# Altium PCB LCD20x4_I2C.PcbDoc
Units mm, origin at the board's own origin, x right, y up, seen from the top; angles counter-clockwise.
Board outline 54 x 18 mm, 2 copper layers (Top Layer, Bottom Layer); 21 components, 23 nets, 73 pads, 28 vias.
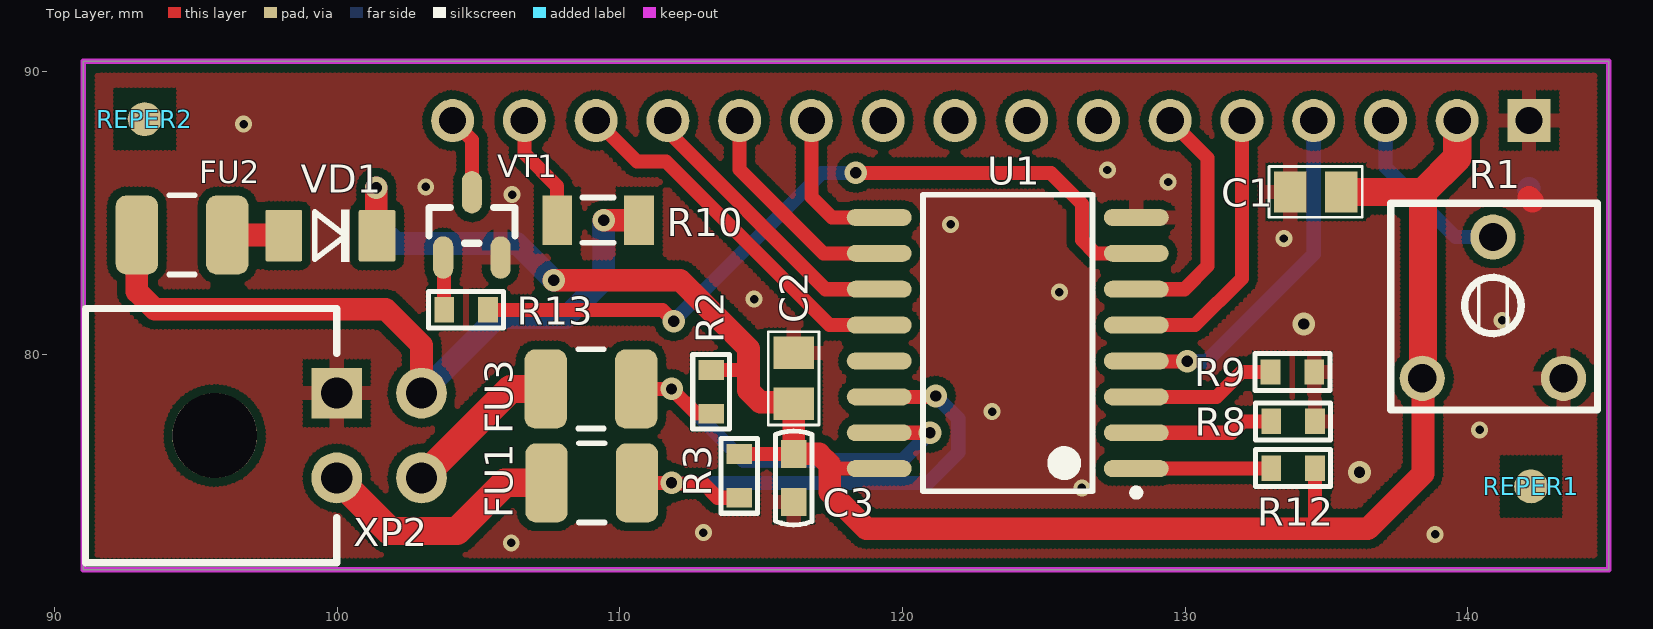
[diagram p0: Top Layer view]
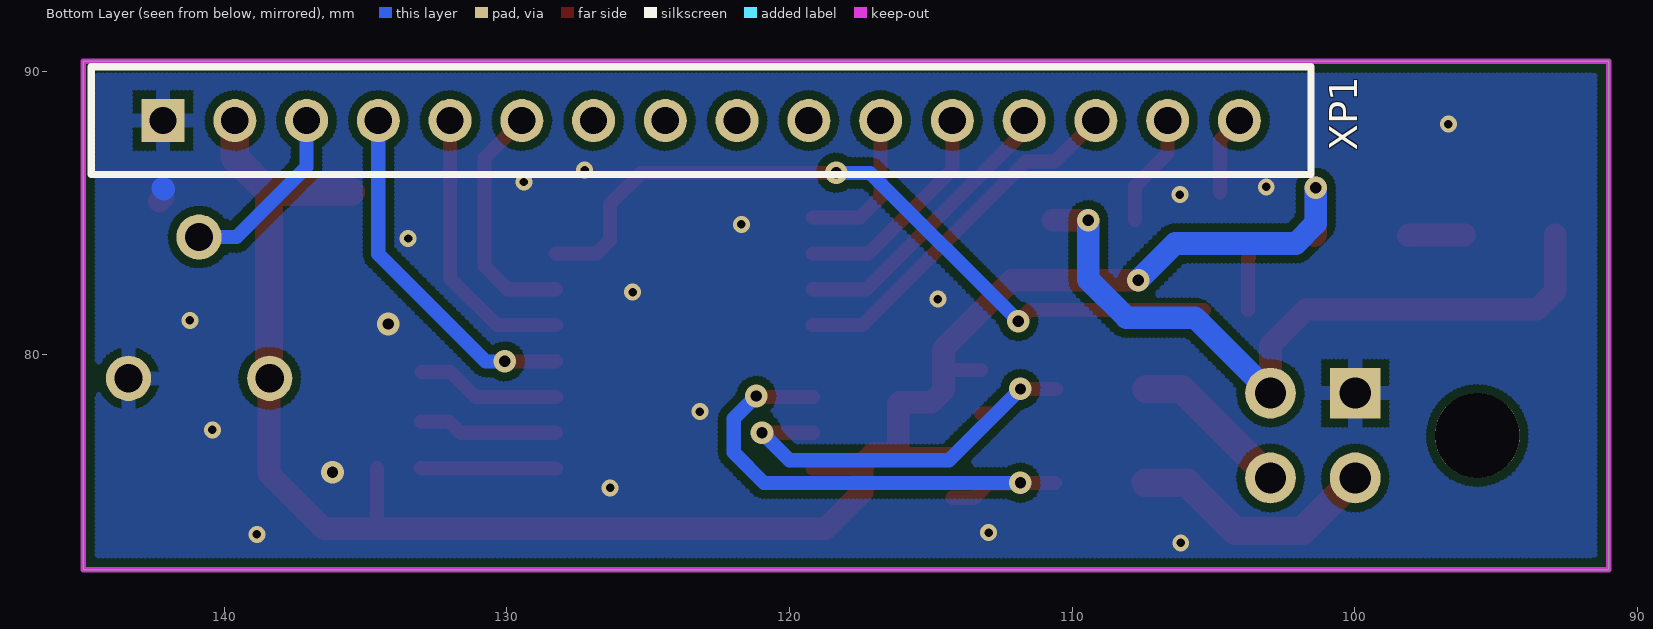
[diagram p1: Bottom Layer view, seen from below]

## Layer stack, top to bottom
Top Solder: solder mask 0.0102, Solder Resist, Dk 3.5
Top Layer: signal copper 0.0356
Dielectric 1: dielectric 0.32, FR-4, Dk 4.8
Bottom Layer: signal copper 0.0356
Bottom Solder: solder mask 0.0102, Solder Resist, Dk 3.5

## Board outline
91,72.375 91,90.375 145,90.375 145,72.375

## Design rules (kind name [scope] priority, off if disabled: settings)
Clearance [All] p1: gap=0.3 ignorepadtopadclearanceinfootprint=FALSE except(0: Arc-Hole Track-Hole SMDPad-Hole THPad-Hole Via-Hole Fill-Hole Poly-Hole Region-Hole Text-Hole)
PolygonConnect PolygonConnect_1 [IsVia] p1: connectstyle=Direct reliefconductorwidth=0.254 reliefentries=4 polygonreliefangle="90 Angle" airgapwidth=0.254
PolygonConnect [All] p2: connectstyle=Relief reliefconductorwidth=0.5 reliefentries=4 polygonreliefangle="90 Angle" airgapwidth=0.3
RoutingVias [All] p1: holewidth=0.4 width=0.8 viastyle="Through Hole" minholewidth=0.3 minwidth=0.6 maxholewidth=0.5 maxwidth=1
SolderMaskExpansion [All] p1: expansion=0.102
Width [All] p1: maxlimit=3 minlimit=0.2 preferedwidth=0.5
30 further rules are at their usual default settings.

## Components (designator, comment, footprint, x,y, rotation, side; value= is the part's Value field where it differs from the comment)
C1 "10uFx10V" CC0805 134.625,85.75 r180 top
C2 "10uFx10V" CC0805 116.15,79.15 r270 top
C3 "0.1uF" CC0603 116.15,75.625 r90 top
FU1 "MICROSMD010F-2" RC1210 109,75.45 r0 top
FU2 "MICROSMD010F-2" RC1210 94.5,84.225 r0 top
FU3 "MICROSMD010F-2" RC1210 108.975,78.775 r0 top
R1 "CA6V-10k" 3318P-1 138.4,79.15 r0 top
R2 "n.p" RC0603 113.225,78.675 r90 top
R3 "n.p" RC0603 114.225,75.7 r90 top
R8 "0E" RC0603 133.825,77.625 r0 top
R9 "0E" RC0603 133.8,79.375 r0 top
R10 "39E" RC1206 109.225,84.75 r180 top
R12 "10k" RC0603 133.825,75.975 r180 top
R13 "100E" RC0603 104.55,81.575 r180 top
REPER1 "REPER1.2" REPER1.2 142.25,75.325 r90 top
REPER2 "REPER1.2" REPER1.2 93.175,88.325 r90 top
U1 "PCF8574ADWR" DW16_N 123.725,80.4 r180 top
VD1 "LL4148" SOD-80 99.75,84.2 r180 top
VT1 "IRLML2402" SOT-23(123) 103.743,83.412 r270 top
XP1 "PLS-16" PIN16S 142.175,88.275 r180 bottom
XP2 "MIF2X02PRP" MIF2X02PRP 99.975,78.625 r180 top

## Footprints (in the part's own frame and the unit in brackets; to place one, negate y for a bottom-side part, rotate by r counter-clockwise, add the part's x,y. Pads: shape width x height; smd on the part's side, far side on the other; paste and mask are expansions set on the pad)
3318P-1 [mm]
  round 1.6 hole 1: 1(0,0) 2(2.5,5) 3(5,0)
  silkscreen extent -1.12,-1.12 6.2,6.2
CC0603 [mm]
  rect 1x0.9 smd paste-25.4: 1(-0.85,0) 2(0.85,0)
  silkscreen extent -1.66,-0.65 1.66,0.65
CC0805 [mm]
  rect 1.15x1.45 smd paste-25.4: 1(-0.9,0) 2(0.9,0)
  silkscreen extent -1.65,-0.9 1.65,0.9
DW16_N [mm] "SOIC, 16-Leads, Body 10.3x7.5mm, Pitch 1.27mm, IPC Medium Density"
  oval 2.3x0.6 smd: 1(-4.55,4.445) 2(-4.55,3.175) 3(-4.55,1.905) 4(-4.55,0.635) 5(-4.55,-0.635) 6(-4.55,-1.905) 7(-4.55,-3.175) 8(-4.55,-4.445) 9(4.55,-4.445) 10(4.55,-3.175) 11(4.55,-1.905) 12(4.55,-0.635) 13(4.55,0.635) 14(4.55,1.905) 15(4.55,3.175) 16(4.55,4.445)
  silkscreen extent -4.67,-5.25 3,5.42, body extent -3.79,-5.25 3.8,5.25, height 2.64
MIF2X02PRP [mm]
  rect 1.8x1.8 hole 1.1: 1(0,0)
  round 1.8 hole 1.1: 2(0,3) 3(-3,0) 4(-3,3)
  round 3 hole 3 unplated: 5(4.32,1.5)
  silkscreen extent 0,-3 8.9,6
PIN16S [mil]
  rect 60x60 hole 38: 1(0,0)
  round 60 hole 38: 2(100,0) 3(200,0) 4(300,0) 5(400,0) 6(500,0) 7(600,0) 8(700,0) 9(800,0) 10(900,0) 11(1000,0) 12(1100,0) 13(1200,0) 14(1300,0) 15(1400,0) 16(1500,0)
  silkscreen extent -100,-75 1600,75
RC0603 [mm]
  rect 0.7x0.9 smd paste-25.4: 1(-0.775,0) 2(0.774,0)
  silkscreen extent -1.32,-0.65 1.33,0.65
RC1206 [mm]
  rect 1.05x1.75 smd paste-25.4: 1(-1.45,0) 2(1.45,0)
  silkscreen extent -0.55,-0.8 0.55,0.8
RC1210 [mm]
  rrect50% 1.5x2.8 smd: 1(-1.6,0) 2(1.6,0)
  silkscreen extent -0.45,-1.4 0.45,1.4
REPER1.2 [mm]
  round 1.2 smd paste-25.4 mask-25.4: 1(0,0)
  Top Layer pour cut-out: -1.2,-1.2 1.2,-1.2 1.2,1.2 -1.2,1.2
SOD-80 [mm]
  rrect10% 1.3x1.83 smd paste-25.4: 1(1.651,0) 2(-1.651,0)
  silkscreen extent -0.66,-0.91 0.56,0.91
SOT-23(123) [mil]
  oval 59.06x28.07 smd: 1(-0.5,0) 2(-0.5,80) 3(-91.5,40)
  silkscreen extent -71,-20 -21,100

## Part data
C1 C2: library part CC0805, "CC0805"
C3: library part CC0603, "CC0603"
FU1 FU2 FU3: library part MICROSMD, "MICROSMD"
R1: library part 3318P-1, "EVND8AA03B25"
R2 R3 R8 R9 R12 R13: library part RC0603, "RC0603"
R10: library part RC1206, "RC1206"
U1: "Remote 8-Bit I/O Expander for I2C-Bus, 2.5 to 6.0 V, -40 to 85 degC, 16-pin SOIC (DW), Green (RoHS & no Sb/Br)", Manufacturer="Texas Instruments", Max Frequency(kHz)=100, Supplier Part Number 1=296-13105-2-ND, Voltage Nodes(V)="5, 3.3", # of I/Os=8, Code_JEDEC=MS-013-AA, ComponentLink1Description=Datasheet, ComponentLink1URL=http://www.ti.com/general/docs/lit/getliterature.tsp?genericPartNumber=PCF8574A&fileType=pdf, ComponentLink2Description="Package Specification", ComponentLink2URL=http://www.ti.com/litv/pdf/msoi003g, DatasheetVersion=SCPS069D, Eco-Plan="Green (RoHS & no Sb/Br)", fSCLK(Max)(MHz)=0.1, I2C Address="0111 xxx", Interrupt Output=Yes, Mounting Technology="Surface Mount", PackageDescription="16-Pin Small Outline Integrated Circuit, 10.3 x 7.5 mm, Pitch 1.27 mm Pitch", PackageReference=DW16, PackageVersion="revG, Jan-2011", PartNumber=PCF8574ADWR, Push-Pull I/O Type=Yes, Reset Input=No, SubFamily="I2C IO Expander", Supplier 1=Digi-Key, Supplier 2=Digi-Key, Supplier 3=Digi-Key, Supplier 4=Newark, Supplier 5=Mouser, Supplier Part Number 2=296-13105-1-ND, Supplier Part Number 3=296-13105-6-ND, Supplier Part Number 4=75C5233, Supplier Part Number 5=595-PCF8574ADWR, VCC(Max)(V)=6, VCC(Min)(V)=2.5, Vcc range(V)="2.5 to 6.0"
VT1: "N-Channel Enhancement Mode Vertical DMOS FET", OriginalName=2N7002

## Via types
v1: diameter 0.6, hole 0.3, Top Layer to Bottom Layer, 16 vias
v2: diameter 0.8, hole 0.4, Top Layer to Bottom Layer, 12 vias

## Nets (pads, with @x,y where several pads share a name; then routed paths per layer and width w, separated by ;. In a path a pad name is that pad's centre, name@x,y a point inside that pad or via, vN(x,y) a via of type N, cw(c..) or ccw(c..) an arc to the next point about the centre after c; other vN are vias at no path point)
+5V: FU2.1 R10.1 XP2.3 | length 26
  Top Layer w0.8: FU2.1 92.9,82.225 93.525,81.6 101.7,81.6 102.975,80.325 XP2.3 ; v2(109.425,84.75) R10.1
  Bottom Layer w0.8: XP2.3 105.65,81.3 108.075,81.3 109.425,82.65 v2(109.425,84.75)
+5V_F: C1.1 C2.2 C3.2 R1.1 R2.2 R3.2 R12.1 U1.16 VD1.2 XP1.2 | length 70.9
  Top Layer w0.5: R2.2 114.526,79.449 114.55,79.425 ; R3.2 C3.2 ; 117.425,76.1 117.57,75.955 U1.16 ; R12.1 134.6,73.9 134.675,73.825
  Top Layer w0.8: v2(101.375,85.9) 101.375,84.226 VD1.2 ; v2(107.65,82.625) 112.125,82.625 114.55,80.2 114.55,79.425 114.55,78.725 114.975,78.3 116.1,78.3 C2.2 C3.2 117.05,76.475 117.425,76.1 117.425,75.125 118.725,73.825 134.675,73.825 136.475,73.825 138.425,75.775 R1.1@138.425,79.175
  Top Layer w1: C1.1 138.425,85.75 ; R1.1@138.425,79.175 138.425,85.75 ; XP1.2 139.635,86.96 138.425,85.75
  Bottom Layer w0.8: v2(101.375,85.9) 101.375,84.625 102.075,83.925 106.35,83.925 v2(107.65,82.625)
BL: R13.1 U1.7 | length 27.2
  Top Layer w0.5: R13.1 111.5,81.575 v2(111.9,81.175) ; v2(118.35,86.425) 125.25,86.425 126.35,85.325 126.35,84.05 126.825,83.575 U1.7
  Bottom Layer w0.5: v2(111.9,81.175) 117.15,86.425 v2(118.35,86.425)
DB4: U1.9 XP1.11 | length 5.4
  Top Layer w0.5: XP1.11 116.775,85.575 117.505,84.845 U1.9
DB5: U1.10 XP1.12 | length 7.9
  Top Layer w0.5: XP1.12 114.235,86.54 117.2,83.575 U1.10
DB6: U1.11 XP1.13 | length 10.2
  Top Layer w0.5: XP1.13 111.695,87.886 117.276,82.305 U1.11
DB7: U1.12 XP1.14 | length 13
  Top Layer w0.5: XP1.14 110.605,86.825 111.625,86.825 117.415,81.035 U1.12
E: U1.6 XP1.6 | length 8.6
  Top Layer w0.5: U1.6 129.98,82.305 130.8,83.125 130.8,86.95 XP1.6
GND: C1.2 C2.1 C3.1 R1.3 R8.2 R9.2 U1.8 VT1.2 XP1.1 XP2.1 | length 0.2
  Top Layer w0.8: 142.175,85.55 142.3,85.425
  Bottom Layer w0.8: 142.15,85.85 142.175,85.875
  other v1: 106.15,73.325 138.85,73.625 112.95,73.69 126.35,75.275 140.425,77.325 123.175,77.975 141.225,81.2 114.75,81.956 125.55,82.2 133.5,84.1 121.7,84.6 106.183,85.65 103.125,85.925 129.4,86.1 127.25,86.525 96.675,88.15
  other v2: 136.175,75.825 134.2,81.075
NetFU1_1: FU1.1 XP2.2 | length 8.9
  Top Layer w1: XP2.2 101.85,73.75 104.225,73.75 105.925,75.45 FU1.1
NetFU1_2: FU1.2 R3.1 U1.14 | length 18.8
  Top Layer w0.5: FU1.2 v2(111.825,75.45) 111.85,75.425 112.95,75.425 113.45,74.925 R3.1 ; U1.14 121.145,78.495 v2(121.175,78.525)
  Bottom Layer w0.5: v2(111.825,75.45) 120.9,75.45 121.975,76.525 121.975,77.725 v2(121.175,78.525)
NetFU2_2: FU2.2 VD1.1 | length 2
  Top Layer w0.8: FU2.2 98.074,84.225 VD1.1
NetFU3_1: FU3.1 XP2.4 | length 5.7
  Top Layer w1: XP2.4 106.125,78.775 FU3.1
NetFU3_2: FU3.2 R2.1 U1.15 | length 15.4
  Top Layer w0.5: FU3.2 v2(111.825,78.775) 112.7,77.9 R2.1 ; U1.15 v2(120.975,77.225)
  Bottom Layer w0.5: v2(111.825,78.775) 114.35,76.25 120,76.25 v2(120.975,77.225)
NetR1_2: R1.2 XP1.3 | length 6.5
  Bottom Layer w0.5: XP1.3 137.095,86.63 139.575,84.15 R1.2
NetR8_1: R8.1 U1.2 | length 4.9
  Top Layer w0.5: U1.2 131.65,77.225 132.05,77.625 R8.1
NetR9_1: R9.1 U1.3 | length 5.1
  Top Layer w0.5: U1.3 131.12,78.495 132,79.375 R9.1
NetR10_2: R10.2 XP1.15 | length 4
  Top Layer w0.5: XP1.15 106.615,87.11 107.775,85.95 R10.2
NetR12_2: R12.2 U1.1 | length 4.8
  Top Layer w0.5: U1.1 133.031,75.955 R12.2
NetR13_2: R13.2 VT1.1 | length 1.9
  Top Layer w0.5: VT1.1 103.776,83.392 R13.2
NetVT1_3: VT1.3 XP1.16 | length 2.8
  Top Layer w0.5: XP1.16 104.759,87.591 VT1.3
RS: U1.4 XP1.4 | length 12.6
  Top Layer w0.5: U1.4 128.29,79.75 v2(130.075,79.75)
  Bottom Layer w0.5: v2(130.075,79.75) 130.75,79.75 134.555,83.555 XP1.4
RW: U1.5 XP1.5 | length 10
  Top Layer w0.5: U1.5 130.36,81.035 132.015,82.69 XP1.5
pads on no net: REPER1.1 REPER2.1 U1.13 XP1.7 XP1.8 XP1.9 XP1.10 XP2.5

## Polygon pours and split planes (outlines as drawn)
GND on Top Layer "GND_L01_P000" (hatched 90Degree grid 0.15 track 0.2, remove dead copper, pour order 0): 91,90.375 145,90.375 145,72.375 91,72.375
GND on Bottom Layer "GND_L02_P002" (hatched 90Degree grid 0.15 track 0.2, remove dead copper, pour order 2): 91,90.375 145,90.375 145,72.375 91,72.375

## Keep-outs
Keep-Out Layer:
  lines w0.2: 91,72.375 91,90.375 101.375,90.375 145,90.375 145,72.375 91,72.375

## Other copper
Top Layer:
  pour cut-out: 108.275,80.312 109.65,80.312 109.65,73.938 108.275,73.938